# Altium PCB PCB1.PcbDoc
Units mil, origin at the board's own origin, x right, y up, seen from the top; angles counter-clockwise.
Board outline 717 x 914 mil, 2 copper layers (Top Layer, Bottom Layer); 8 components, 9 nets, 28 pads, 0 vias.
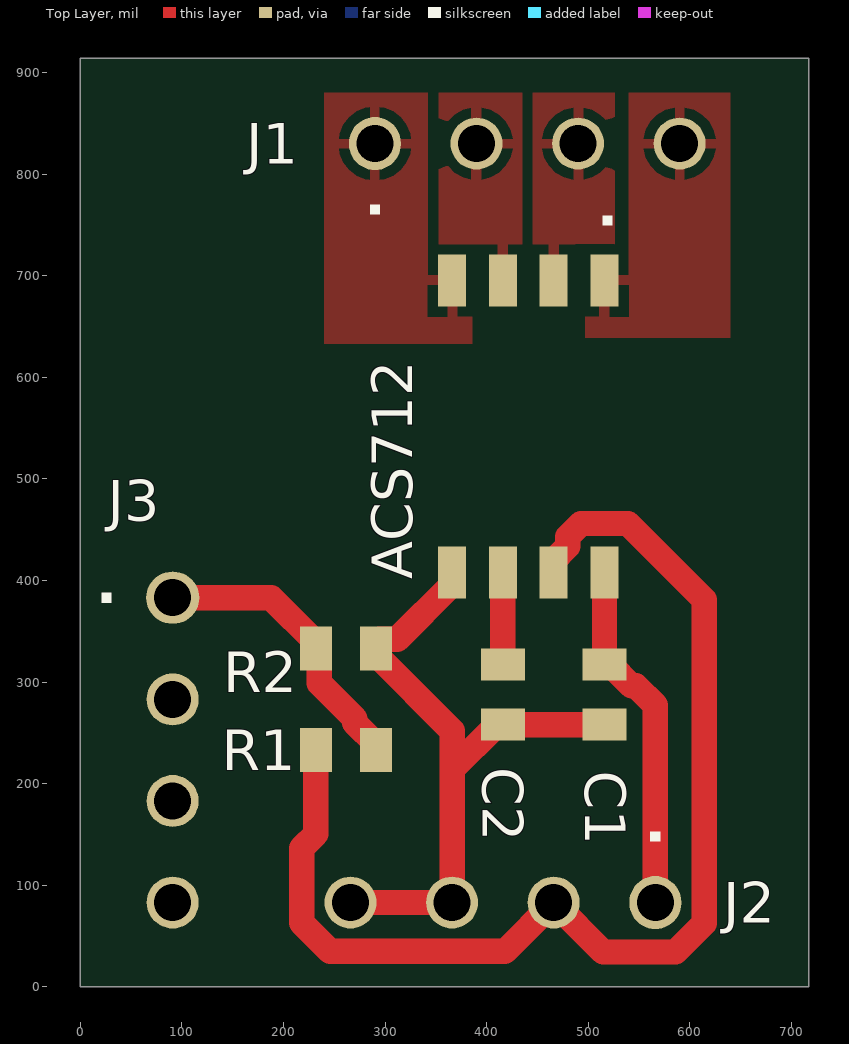
[diagram p0: Top Layer view]
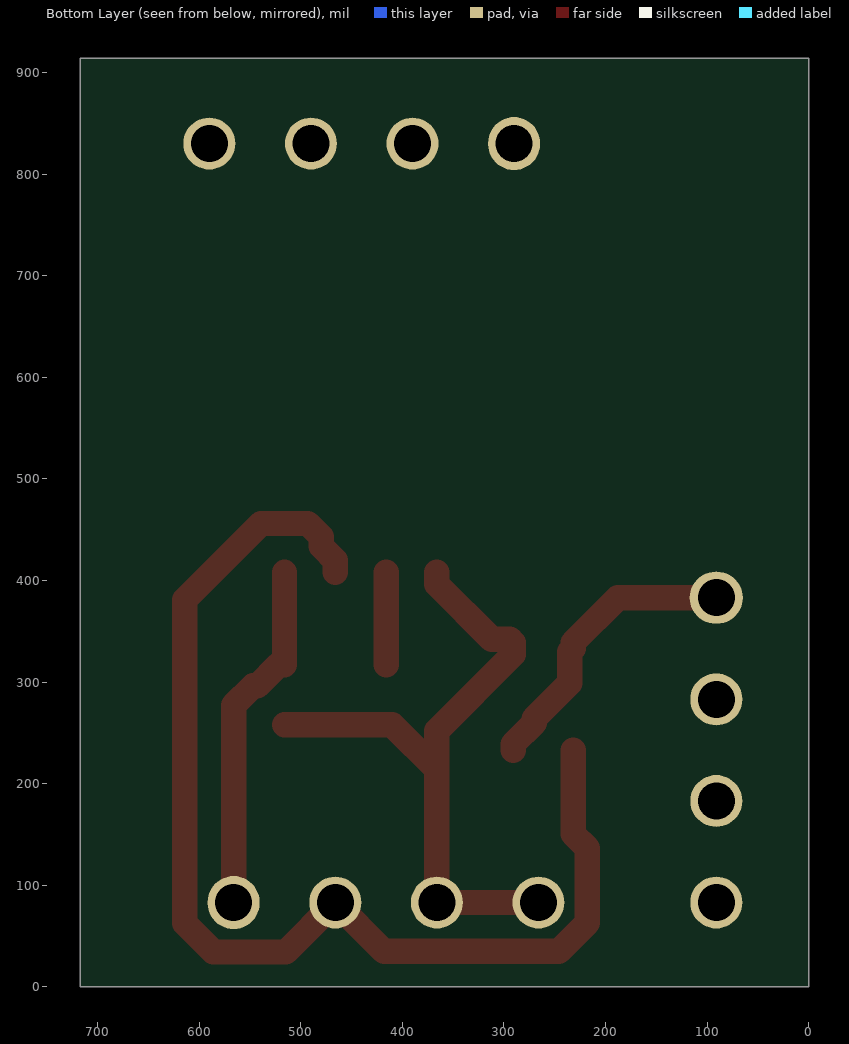
[diagram p1: Bottom Layer view, seen from below]
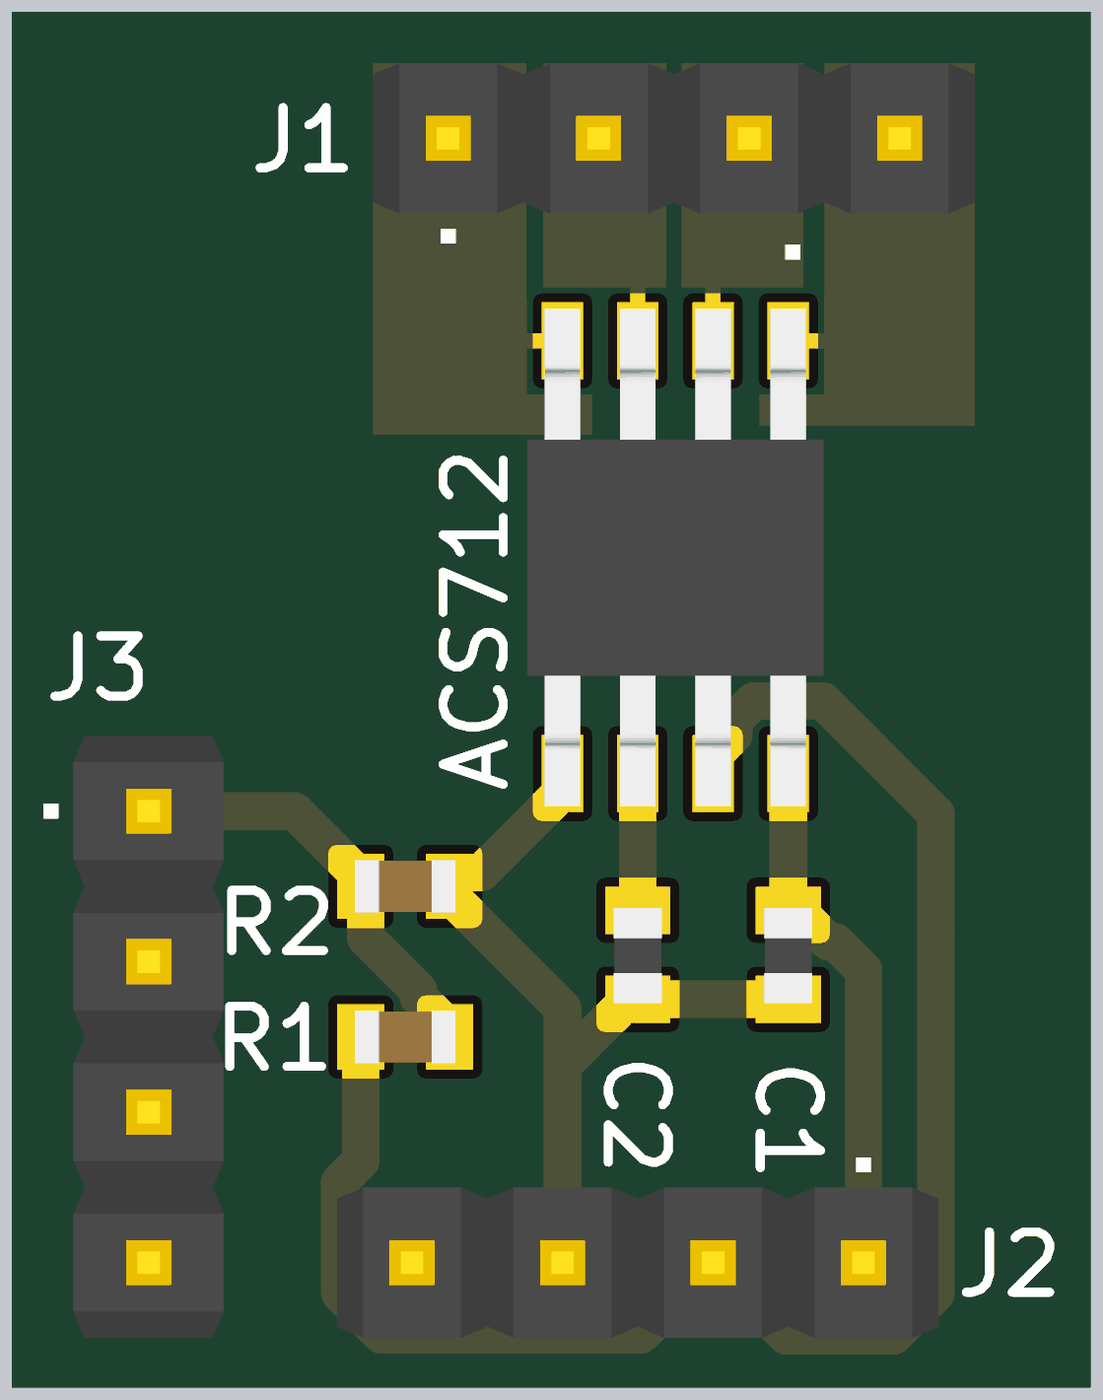
[diagram p2: 3D render of the assembled board from above, using the file's embedded part models]

## Layer stack, top to bottom
Top Solder: solder mask 0.4, Solder Resist, Dk 3.5
Top Layer: signal copper 1.4
Dielectric 1: dielectric 12.6, FR-4, Dk 4.8
Bottom Layer: signal copper 1.4
Bottom Solder: solder mask 0.4, Solder Resist, Dk 3.5

## Board outline
0,0 717,0 717,914 0,914

## Design rules (kind name [scope] priority, off if disabled: settings)
Clearance [All] p1: gap=10 ignorepadtopadclearanceinfootprint=FALSE
PolygonConnect [All] p1: connectstyle=Relief reliefconductorwidth=10 reliefentries=4 polygonreliefangle="90 Angle" airgapwidth=10
RoutingVias [All] p1: holewidth=28 width=50 viastyle="Through Hole" minholewidth=28 minwidth=50 maxholewidth=28 maxwidth=50
SolderMaskExpansion [All] p1: expansion=4 istentingtop=FALSE
SupplyNets "Schematic Supply Nets" [InNet('GND')] p1: voltage=0.000
Width [All] p1: maxlimit=1000 minlimit=9 preferedwidth=25
30 further rules are at their usual default settings.

## Components (designator, comment, footprint, x,y, rotation, side; value= is the part's Value field where it differs from the comment)
ACS712 "ACS712ELCTR-20A-T" 8SOIC 517,695.4 r270 top
C1 "0.1u, 16V" "0603 Capacitor" 516,317.06 r270 top value=100nF
C2 "1000p, 50V" "0603 Capacitor" 416,317.06 r270 top value=1nF
J1 "826646-4" Header-4Pin 290,830 r90 top
J2 "826646-4" Header-4Pin 566,83 r270 top
J3 "826646-4" Header-4Pin 91,383 r0 top
R1 "6.8k 0.1W 0603" "0603 Resisitor" 231.94,233 r0 top value=6.8kR
R2 "3.3k, 0.1W 0603" "0603 Resisitor" 231.94,333 r0 top value=3.3kR

## Footprints (in the part's own frame and the unit in brackets; to place one, negate y for a bottom-side part, rotate by r counter-clockwise, add the part's x,y. Pads: shape width x height; smd on the part's side, far side on the other; paste and mask are expansions set on the pad)
8SOIC [mm]
  rect 1.3x0.7 smd paste-2539.97 mask+0.152: 1(0,-0.025) 2(0,-1.295) 3(0,-2.565) 4(0,-3.835) 5(7.3,-3.835) 6(7.3,-2.565) 7(7.3,-1.295) 8(7.3,-0.025)
  silkscreen extent -1.63,-0.08 -1.37,0.18, body extent -0.54,-4.43 7.86,0.57, height 1.75
"0603 Capacitor" [mm]
  rect 0.8x1.1 smd paste-2539.97 mask+0.152: 1(0,0) 2(1.5,0)
  body extent -0.04,-0.41 1.56,0.41, height 0.71
"0603 Resisitor" [mm]
  rect 0.8x1.1 smd paste-2539.97 mask+0.152: 1(0,0) 2(1.5,0)
  body extent -0.1,-0.44 1.6,0.44, height 0.56
Header-4Pin [mm]
  oval 1.33x1.3 hole 0.925 paste-2539.97 mask+0.152: 1(0,0)
  round 1.3 hole 0.925 paste-2539.97 mask+0.152: 2(0,-2.54) 3(0,-5.08) 4(0,-7.62)
  silkscreen extent -1.78,-0.13 -1.52,0.13, body extent -1.27,-8.89 1.27,1.27, height 9.6

## Part data
ACS712: "Analog Circuit, 1 Func, BICMOS, PDSO8", Case/Package=SOP, Manufacturer="Allegro MicroSystems", Max Operating Temperature=85°C, Max Supply Voltage=5.5V, Min Operating Temperature=-40°C, Min Supply Voltage=4.5V, Nominal Supply Voltage=5V, Package Body Material=Plastic, Package Shape=Rectangular, Package Style="SMALL OUTLINEMeter", Peak Reflow Temperature (Cel)=260°C, Temperature Grade=INDUSTRIAL, Time @ Peak Reflow Temperature-Max (s)=40s, Category="Current Sensors", Channels=1, ComponentLink1Description=https://datasheet.ciiva.com:443/pdfs/VipMasterIC/IC/ALLE/ALLE-S-A0009734349/ALLE-S-A0009734349-1.pdf?src-supplier=IHS+Markit, ComponentLink1URL=https://datasheet.ciiva.com:443/pdfs/VipMasterIC/IC/ALLE/ALLE-S-A0009734349/ALLE-S-A0009734349-1.pdf?src-supplier=IHS+Markit, ComponentLink2Description=https://datasheet.ciiva.com/15099/getdatasheetpartid-312820-15099471.pdf?src-supplier=Verical, ComponentLink2URL=https://datasheet.ciiva.com/15099/getdatasheetpartid-312820-15099471.pdf?src-supplier=Verical, ComponentLink3Description=https://datasheet.ciiva.com/3271/acs712-datasheet-3271995.pdf?src-supplier=Avnet, ComponentLink3URL=https://datasheet.ciiva.com/3271/acs712-datasheet-3271995.pdf?src-supplier=Avnet, ComponentLink4Description=https://datasheet.ciiva.com/3272/acs712-datasheet-3272423.pdf?src-supplier=Avnet, ComponentLink4URL=https://datasheet.ciiva.com/3272/acs712-datasheet-3272423.pdf?src-supplier=Avnet, ComponentLink5Description=https://datasheet.ciiva.com/1165/64754-1165093.pdf?src-supplier=Element14, ComponentLink5URL=https://datasheet.ciiva.com/1165/64754-1165093.pdf?src-supplier=Element14, Height - Seated (Max)=1.75mm, JESD-30 Code=R-PDSO-G8, JESD-609 Code=e3, Length=4.9mm, Manufacturer Part Number=ACS712ELCTR-20A-T, Moisture Sensitivity Level=2, Pins=8, Pricing="1=2.843, 10=2.397, 25=2.366, 50=2.245, 100=1.909, 250=1.89, 500=1.78, 1000=1.702, 3000=1.678 (USD)", Qualification Status="Not Qualified", Reach SVHC Compliant=Yes, RoHS=Yes, RoHS Compliant=Yes, Stock=4200, Supplier="Arrow Electronics", Supplier Part Number=ACS712ELCTR-20A-T, Surface Mount=Yes, Technology=BICMOS, Terminal Finish=Tin, Terminal Form="Gull Wing", Terminal Pitch=1.27mm, Terminal Position=DUAL, Throw Configuration="ANALOG CIRCUIT", Width=3.9mm
C1: library part CC0603KRX7R7BB104, "Ceramic Capacitor, Multilayer, Ceramic, 16V, 10% +Tol, 10% -Tol, X7R, 15% TC, 0.1uF, Surface Mount, 0603", Capacitor Type=Ceramic, Case/Package=0603, Manufacturer=Yageo, Max Operating Temperature=125°C, Min Operating Temperature=-55°C, Package Shape=Rectangular, Package Style=SMTMeter, Rated DC Voltage (URdc)=16V, Supplier Part Number=2938116, Temperature Characteristics Code=X7R, Tolerance  (fill in as +-)=10%, Category="Ceramic Capacitors", ComponentLink1Description=https://datasheet.ciiva.com:443/pdfs/VipMasterIC/IC/YAGO/YAGO-S-A0003557223/YAGO-S-A0003557223-1.pdf?src-supplier=IHS+Markit, ComponentLink1URL=https://datasheet.ciiva.com:443/pdfs/VipMasterIC/IC/YAGO/YAGO-S-A0003557223/YAGO-S-A0003557223-1.pdf?src-supplier=IHS+Markit, ComponentLink2Description=https://datasheet.ciiva.com/11786/0900766b80d84f1d-11786077.pdf?src-supplier=Rs, ComponentLink2URL=https://datasheet.ciiva.com/11786/0900766b80d84f1d-11786077.pdf?src-supplier=Rs, ComponentLink3Description=https://datasheet.ciiva.com/46430/1734573-46430156.pdf?src-supplier=Element14, ComponentLink3URL=https://datasheet.ciiva.com/46430/1734573-46430156.pdf?src-supplier=Element14, ComponentLink4Description=https://datasheet.ciiva.com/8033/1734573-8033797.pdf?src-supplier=Element14, ComponentLink4URL=https://datasheet.ciiva.com/8033/1734573-8033797.pdf?src-supplier=Element14, ComponentLink5Description=https://datasheet.ciiva.com/8033/70765-8033799.pdf?src-supplier=Element14, ComponentLink5URL=https://datasheet.ciiva.com/8033/70765-8033799.pdf?src-supplier=Element14, ComponentLink6Description=https://datasheet.ciiva.com/28450/1489800-28450552.pdf?src-supplier=Element14, ComponentLink6URL=https://datasheet.ciiva.com/28450/1489800-28450552.pdf?src-supplier=Element14, ComponentLink7Description=https://datasheet.ciiva.com/144/mlccorderingcode-144182.pdf?src-supplier=Digikey, ComponentLink7URL=https://datasheet.ciiva.com/144/mlccorderingcode-144182.pdf?src-supplier=Digikey, ComponentLink8Description=https://datasheet.ciiva.com/144/mlccorderingcode-144183.pdf?src-supplier=Digikey, ComponentLink8URL=https://datasheet.ciiva.com/144/mlccorderingcode-144183.pdf?src-supplier=Digikey, ComponentLink9Description=https://datasheet.ciiva.com/144/mlccorderingcode-144184.pdf?src-supplier=Digikey, ComponentLink9URL=https://datasheet.ciiva.com/144/mlccorderingcode-144184.pdf?src-supplier=Digikey, ComponentLink10Description=https://datasheet.ciiva.com/11464/upy-gphc-x7r-6-3v-to-50v-8-11464735.pdf?src-supplier=Avnet, ComponentLink10URL=https://datasheet.ciiva.com/11464/upy-gphc-x7r-6-3v-to-50v-8-11464735.pdf?src-supplier=Avnet, ComponentLink11Description=https://datasheet.ciiva.com/13395/upy-gphc-x7r-6-3v-to-50v-8-13395674.pdf?src-supplier=Mouser, ComponentLink11URL=https://datasheet.ciiva.com/13395/upy-gphc-x7r-6-3v-to-50v-8-13395674.pdf?src-supplier=Mouser, ComponentLink12Description=https://datasheet.ciiva.com/7978/1489800-7978141.pdf?src-supplier=Element14, ComponentLink12URL=https://datasheet.ciiva.com/7978/1489800-7978141.pdf?src-supplier=Element14, ComponentLink13Description=https://datasheet.ciiva.com/15165/getdatasheetpartid-63554-15165387.pdf?src-supplier=Verical, ComponentLink13URL=https://datasheet.ciiva.com/15165/getdatasheetpartid-63554-15165387.pdf?src-supplier=Verical, Dielectric Material=Ceramic, Height=0.8mm, JESD-609 Code=e3, Length=1.6mm, Manufacturer Part Number=CC0603KRX7R7BB104, Mounting Technology="Surface Mount", Multilayer=Yes, Packaging="Tape and Reel", Pins=2, Pricing="4000=0.0049, 16000=0.0047, 60000=0.0045, 160000=0.0044, 400000=0.0042 (USD)", Reach SVHC Compliant=Yes, RoHS=Yes, RoHS Compliant=Yes, Stock=4556000, Supplier="Future Electronics", Terminal Finish=Nickel, Termination=Wraparound, Tolerance (fill in as +-)=10%, Width=0.8mm
C2: library part CC0603KRX7R9BB102, "Ceramic Capacitor, Multilayer, Ceramic, 50V, 10% +Tol, 10% -Tol, X7R, 15% TC, 0.001uF, Surface Mount, 0603", Capacitor Type=Ceramic, Case/Package=0603, Manufacturer=Yageo, Max Operating Temperature=125°C, Min Operating Temperature=-55°C, Package Shape=Rectangular, Package Style=SMTMeter, Rated DC Voltage (URdc)=50V, Supplier Part Number=7479959, Temperature Characteristics Code=X7R, Tolerance  (fill in as +-)=10%, Category="Ceramic Capacitors", ComponentLink1Description=https://datasheet.ciiva.com:443/pdfs/VipMasterIC/IC/YAGO/YAGO-S-A0003557223/YAGO-S-A0003557223-1.pdf?src-supplier=IHS+Markit, ComponentLink1URL=https://datasheet.ciiva.com:443/pdfs/VipMasterIC/IC/YAGO/YAGO-S-A0003557223/YAGO-S-A0003557223-1.pdf?src-supplier=IHS+Markit, ComponentLink2Description=https://datasheet.ciiva.com/144/mlccorderingcode-144415.pdf?src-supplier=Digikey, ComponentLink2URL=https://datasheet.ciiva.com/144/mlccorderingcode-144415.pdf?src-supplier=Digikey, ComponentLink3Description=https://datasheet.ciiva.com/11786/0900766b8079c870-11786075.pdf?src-supplier=Rs, ComponentLink3URL=https://datasheet.ciiva.com/11786/0900766b8079c870-11786075.pdf?src-supplier=Rs, ComponentLink4Description=https://datasheet.ciiva.com/144/mlccorderingcode-144416.pdf?src-supplier=Digikey, ComponentLink4URL=https://datasheet.ciiva.com/144/mlccorderingcode-144416.pdf?src-supplier=Digikey, ComponentLink5Description=https://datasheet.ciiva.com/144/mlccorderingcode-144417.pdf?src-supplier=Digikey, ComponentLink5URL=https://datasheet.ciiva.com/144/mlccorderingcode-144417.pdf?src-supplier=Digikey, ComponentLink6Description=https://datasheet.ciiva.com/46430/1734573-46430159.pdf?src-supplier=Element14, ComponentLink6URL=https://datasheet.ciiva.com/46430/1734573-46430159.pdf?src-supplier=Element14, ComponentLink7Description=https://datasheet.ciiva.com/15189/getdatasheetpartid-251790-15189165.pdf?src-supplier=Verical, ComponentLink7URL=https://datasheet.ciiva.com/15189/getdatasheetpartid-251790-15189165.pdf?src-supplier=Verical, ComponentLink8Description=https://datasheet.ciiva.com/29242/445532-da-01-en-kerko-chip-0603-np0-1000pf-29242198.pdf?src-supplier=Conrad, ComponentLink8URL=https://datasheet.ciiva.com/29242/445532-da-01-en-kerko-chip-0603-np0-1000pf-29242198.pdf?src-supplier=Conrad, Dielectric Material=Ceramic, Height=0.8mm, JESD-609 Code=e3, Length=1.6mm, Manufacturer Part Number=CC0603KRX7R9BB102, Mounting Technology="Surface Mount", Multilayer=Yes, Packaging="Tape and Reel", Pins=2, Pricing="4000=0.0035, 16000=0.0034, 80000=0.0032, 160000=0.0032, 500000=0.003 (USD)", Reach SVHC Compliant=Yes, RoHS=Yes, RoHS Compliant=Yes, Stock=6780000, Supplier="Future Electronics", Terminal Finish=Nickel, Termination=Wraparound, Tolerance (fill in as +-)=10%, Width=0.8mm
J1 J2 J3: "Board Connector, 4 Contact(s), 1 Row(s), Male, Straight, Solder Terminal, Green Insulator", Flammability Rating="UL94 V-0", Manufacturer="TE Connectivity", Category=Connectors, ComponentLink1Description=https://datasheet.ciiva.com:443/pdfs/VipMasterIC/IC/TYEL/TYEL-S-A0008869674/TYEL-S-A0008859122-1.pdf?src-supplier=IHS+Markit, ComponentLink1URL=https://datasheet.ciiva.com:443/pdfs/VipMasterIC/IC/TYEL/TYEL-S-A0008869674/TYEL-S-A0008859122-1.pdf?src-supplier=IHS+Markit, ComponentLink2Description=https://datasheet.ciiva.com/11754/0900766b80d7c469-11754249.pdf?src-supplier=Rs, ComponentLink2URL=https://datasheet.ciiva.com/11754/0900766b80d7c469-11754249.pdf?src-supplier=Rs, ComponentLink3Description=https://datasheet.ciiva.com/29369/001094742-da-01-en-stiftleiste-1-reihig-0-0826646-4-29369555.pdf?src-supplier=Conrad, ComponentLink3URL=https://datasheet.ciiva.com/29369/001094742-da-01-en-stiftleiste-1-reihig-0-0826646-4-29369555.pdf?src-supplier=Conrad, ComponentLink4Description=https://datasheet.ciiva.com/717/eng-cd-826629-aa-basefilename-717525.pdf?src-supplier=Digikey, ComponentLink4URL=https://datasheet.ciiva.com/717/eng-cd-826629-aa-basefilename-717525.pdf?src-supplier=Digikey, Connector Type="BOARD CONNECTOR", Contact Finish - Mating="GOLD (30)", Contact Finish - Termination=TIN, Contact Gender=Male, Contact Material=Bronze, DIN Conformance=No, Filter Feature=No, IEC Conformance=No, JESD-609 Code=e3, Manufacturer Part Number=826646-4, MIL Conformance=No, Mixed Contacts=No, Mounting Style=STRAIGHT, Mounting Technology=Board, Number of Contacts=4, Number of Rows Loaded=1, Option="General Purpose", Pricing="1=0.3449, 10=0.3085, 100=0.2734, 500=0.2482, 1500=0.2446 (USD)", Reach SVHC Compliant=Yes, RoHS=Yes, RoHS Compliant=Yes, Stock=10257, Supplier="Arrow Electronics", Supplier Part Number=826646-4, Terminal Pitch=2.54mm, Termination=Solder
R1: library part RC0603FR-106K8L, "Fixed Resistor, Metal Glaze/thick Film, 0.1W, 6800ohm, 75V, 1% +/-Tol, 100ppm/Cel, Surface Mount, 0603", Case/Package=0603, Manufacturer=Yageo, Max Operating Temperature=155°C, Min Operating Temperature=-55°C, Package Height=0.45mm, Package Length=1.6mm, Package Shape=Rectangular, Package Width=0.8mm, Power=100mW, Rated Temperature=70°C, Resistor Type="FIXED RESISTOR", Supplier Part Number=32AK1101, Temperature Coefficient=100ppm/°C, Tolerance=1%, Working Voltage=75V, Additional Feature="LASER TRIMMABLE", Category="Chip SMD Resistors", ComponentLink1Description=https://datasheet.ciiva.com:443/pdfs/VipMasterIC/IC/YAGO/YAGO-S-A0008145938/YAGO-S-A0008145938-1.pdf?src-supplier=IHS+Markit, ComponentLink1URL=https://datasheet.ciiva.com:443/pdfs/VipMasterIC/IC/YAGO/YAGO-S-A0008145938/YAGO-S-A0008145938-1.pdf?src-supplier=IHS+Markit, ComponentLink2Description=https://datasheet.ciiva.com/12561/rc0603-272842-12561433.pdf?src-supplier=Mouser, ComponentLink2URL=https://datasheet.ciiva.com/12561/rc0603-272842-12561433.pdf?src-supplier=Mouser, Construction=Chip, JESD-609 Code=e3, Manufacturer Part Number=RC0603FR-106K8L, Mounting Technology="Surface Mount", Packaging="Tape and Reel", Pins=2, Pricing="10=0.012, 25=0.01, 50=0.009, 100=0.007 (USD)", Reach SVHC Compliant=Yes, RoHS=Yes, RoHS Compliant=Yes, Stock=10030, Supplier=Newark, Technology="METAL GLAZE/THICK FILM", Terminal Finish=Nickel, Termination=Wraparound
R2: library part RC0603FR-073K3L, "Fixed Resistor, Metal Glaze/thick Film, 0.1W, 3300ohm, 75V, 1% +/-Tol, 100ppm/Cel, Surface Mount, 0603", Case/Package=0603, Manufacturer=Yageo, Max Operating Temperature=155°C, Min Operating Temperature=-55°C, Package Height=0.45mm, Package Length=1.6mm, Package Shape=Rectangular, Package Width=0.8mm, Power=100mW, Rated Temperature=70°C, Resistor Type="FIXED RESISTOR", Supplier Part Number=6497630, Temperature Coefficient=100ppm/°C, Tolerance=1%, Working Voltage=75V, Additional Feature="LASER TRIMMABLE", Category="Chip SMD Resistors", ComponentLink1Description=https://datasheet.ciiva.com:443/pdfs/VipMasterIC/IC/YAGO/YAGO-S-A0008145938/YAGO-S-A0008145938-1.pdf?src-supplier=IHS+Markit, ComponentLink1URL=https://datasheet.ciiva.com:443/pdfs/VipMasterIC/IC/YAGO/YAGO-S-A0008145938/YAGO-S-A0008145938-1.pdf?src-supplier=IHS+Markit, ComponentLink2Description=https://datasheet.ciiva.com/46440/1868787-46440905.pdf?src-supplier=Element14, ComponentLink2URL=https://datasheet.ciiva.com/46440/1868787-46440905.pdf?src-supplier=Element14, ComponentLink3Description=https://datasheet.ciiva.com/2453/pyu-r-int-thick-7-2453926.pdf?src-supplier=Digikey, ComponentLink3URL=https://datasheet.ciiva.com/2453/pyu-r-int-thick-7-2453926.pdf?src-supplier=Digikey, ComponentLink4Description=https://datasheet.ciiva.com/2453/pyu-r-int-thick-7-2453927.pdf?src-supplier=Digikey, ComponentLink4URL=https://datasheet.ciiva.com/2453/pyu-r-int-thick-7-2453927.pdf?src-supplier=Digikey, ComponentLink5Description=https://datasheet.ciiva.com/7746/443971-7746344.pdf?src-supplier=Element14, ComponentLink5URL=https://datasheet.ciiva.com/7746/443971-7746344.pdf?src-supplier=Element14, ComponentLink6Description=https://datasheet.ciiva.com/7746/1686128-7746345.pdf?src-supplier=Element14, ComponentLink6URL=https://datasheet.ciiva.com/7746/1686128-7746345.pdf?src-supplier=Element14, ComponentLink7Description=https://datasheet.ciiva.com/7746/443971-7746346.pdf?src-supplier=Element14, ComponentLink7URL=https://datasheet.ciiva.com/7746/443971-7746346.pdf?src-supplier=Element14, Construction=Chip, JESD-609 Code=e3, Manufacturer Part Number=RC0603FR-073K3L, Mounting Technology="Surface Mount", Packaging="Tape and Reel", Pins=2, Pricing="5000=0.0019, 50000=0.0018, 150000=0.0018, 375000=0.0017, 1000000=0.0016 (USD)", Reach SVHC Compliant=Yes, RoHS=Yes, RoHS Compliant=Yes, Stock=1520000, Supplier="Future Electronics", Technology="METAL GLAZE/THICK FILM", Terminal Finish=Nickel, Termination=Wraparound

## Nets (pads, with @x,y where several pads share a name; then routed paths per layer and width w, separated by ;. In a path a pad name is that pad's centre, name@x,y a point inside that pad or via, vN(x,y) a via of type N, cw(c..) or ccw(c..) an arc to the next point about the centre after c; other vN are vias at no path point)
GND: ACS712.5 C1.2 C2.2 J2.3 J2.4 R2.2 | length 665.8
  Top Layer w25: J2.4 J2.3 366,213.91 ; ACS712.5 366,396.19 311.96,342.15 294.25,342.15 291,338.91 R2.2 291,327.09 366,252.09 366,213.91 ; C1.2 C2.2 410.09,258 366,213.91
NetACS712_1: ACS712.1 J1.4
NetACS712_2: ACS712.2 J1.3
NetACS712_3: ACS712.3 J1.2
NetACS712_4: ACS712.4 J1.1
NetACS712_6: ACS712.6 C2.1 | length 90.9
  Top Layer w25: C2.1 ACS712.6
NetACS712_7: ACS712.7 J2.2 R1.1 | length 1165.4
  Top Layer w25: R1.1 231.94,150.48 217.91,136.45 217.91,63.08 246.08,34.91 417.91,34.91 J2.2 514.68,34.32 585.92,34.32 614.09,62.49 614.09,381.1 539.1,456.09 492.9,456.09 479.72,442.91 479.72,433.53 466,419.81 ACS712.7
NetACS712_8: ACS712.8 C1.1 J2.1 | length 351.7
  Top Layer w25: ACS712.8 C1.1 521.91,317.06 542.71,296.25 546.97,296.25 566,277.22 J2.1
NetJ3_1: J3.1 R1.2 R2.1 | length 289.6
  Top Layer w25: J3.1 187.85,383 231.94,338.91 R2.1 235.19,329.75 235.19,298.97 270.19,263.97 270.19,259.71 291,238.91 R1.2
pads on no net: J3.2 J3.3 J3.4

## Polygon pours and split planes (outlines as drawn)
NetACS712_3 on Top Layer "NETACS712_3_L01_P000" (solid, pour order 0): 396,662 435,662 435,880 353,880 353,731 396,731
NetACS712_2 on Top Layer "NETACS712_2_L01_P003" (solid, pour order 3): 443,663 487,663 487,731 526,731 526,880 443,880
NetACS712_1 on Top Layer "NETACS712_1_L01_P005" (solid, pour order 5): 497,727 497,639 640,639 640,880 540,880 540,727
NetACS712_4 on Top Layer "NETACS712_4_L01_P007" (solid, pour order 7): 240,880 240,633 386,633 386,723 342,723 342,880